# Altium PCB PCB_TRAFFICLIGHT.PcbDoc
Units mil, origin at the board's own origin, x right, y up, seen from the top; angles counter-clockwise.
Board outline 3825 x 2140 mil, 2 copper layers (Top Layer, Bottom Layer); 8 components, 8 nets, 44 pads, 0 vias.
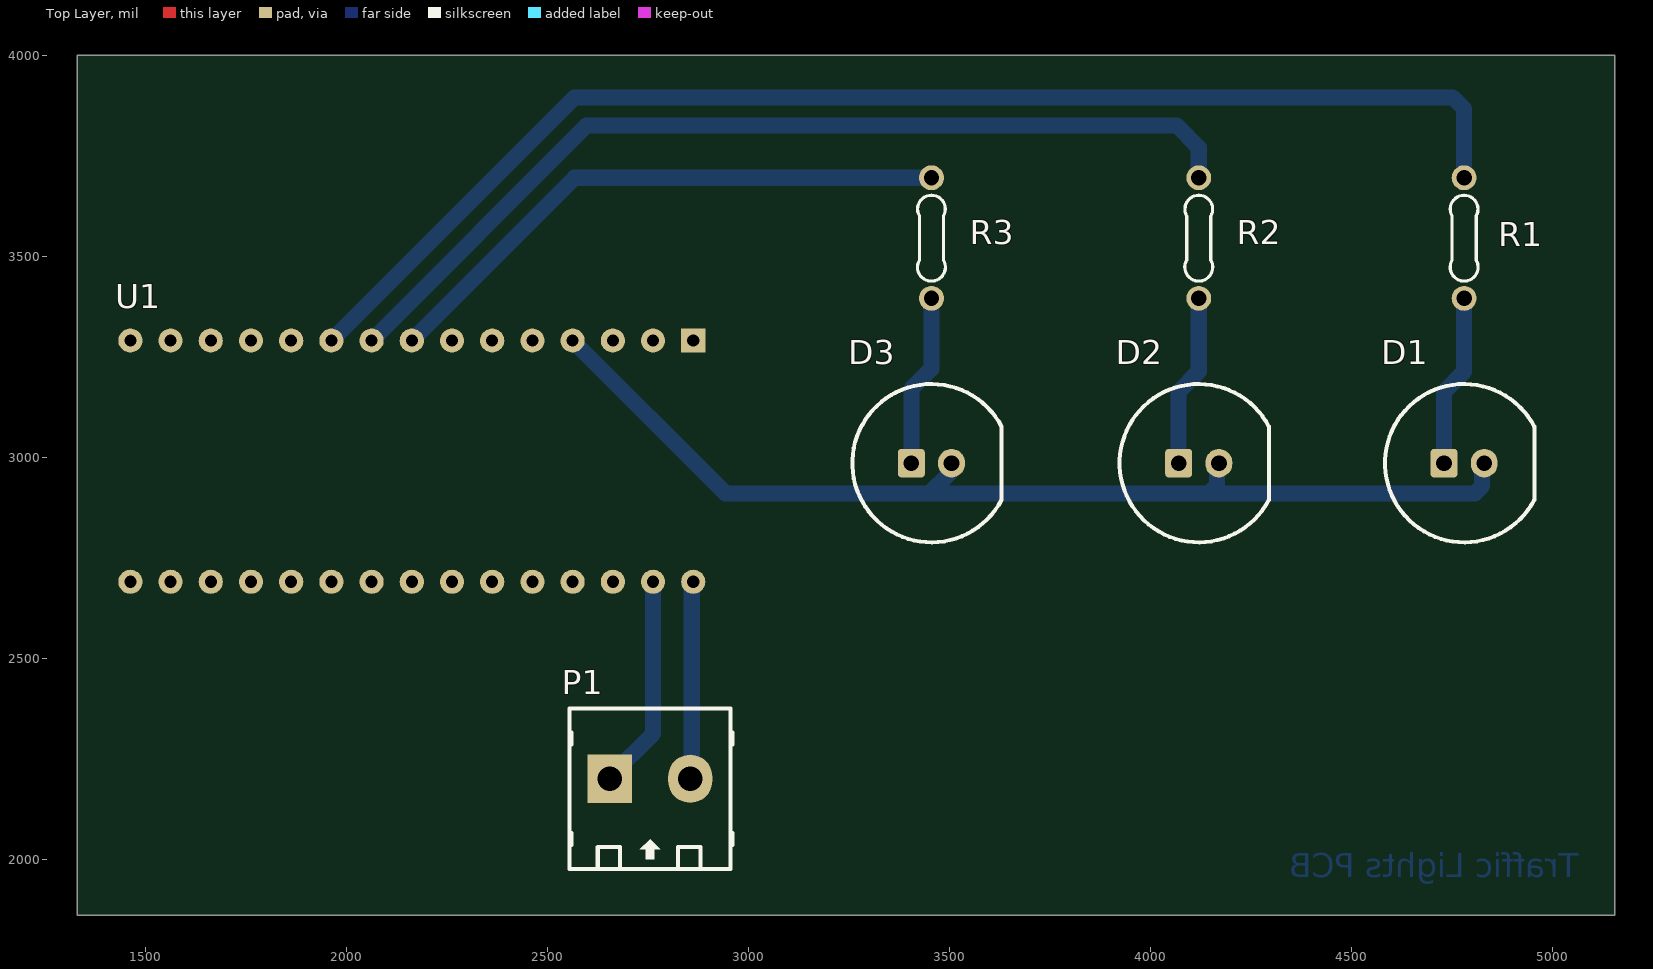
[diagram p0: Top Layer view]
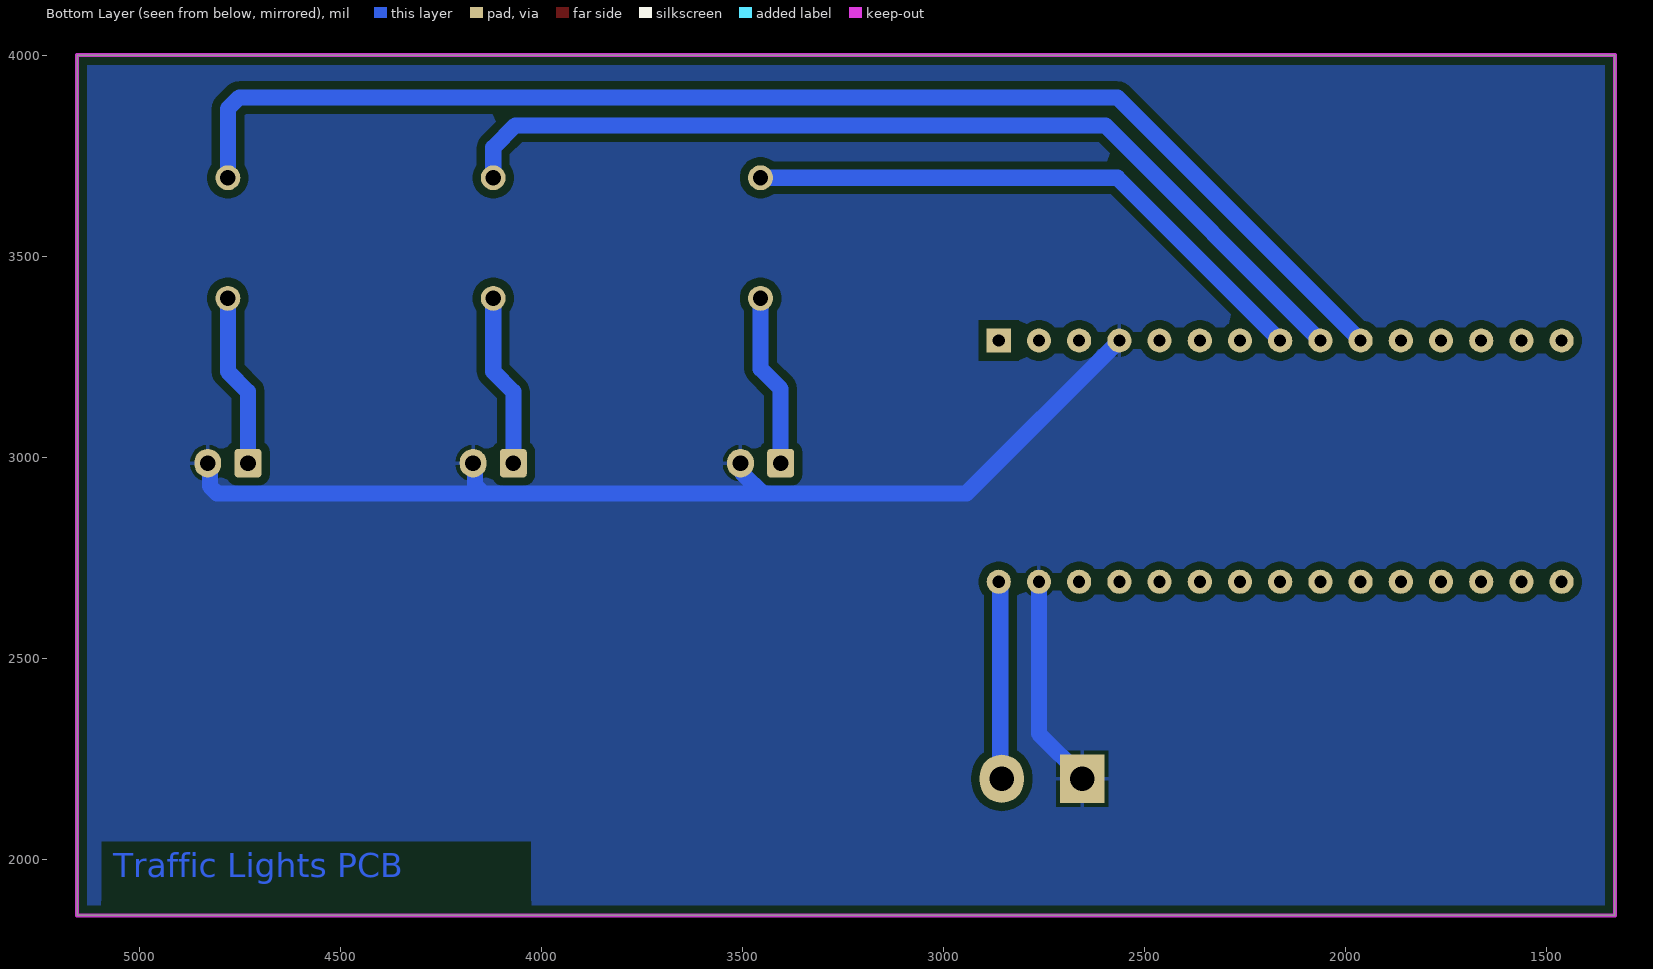
[diagram p1: Bottom Layer view, seen from below]

## Layer stack, top to bottom
Top Solder: solder mask 0.4, Solder Resist, Dk 3.5
Top Layer: signal copper 1.4
Dielectric 1: dielectric 12.6, FR-4, Dk 4.8
Bottom Layer: signal copper 1.4
Bottom Solder: solder mask 0.4, Solder Resist, Dk 3.5

## Board outline
1330,1860 5155,1860 5155,4000 1330,4000

## Design rules (kind name [scope] priority, off if disabled: settings)
Clearance [All] p1: gap=20 ignorepadtopadclearanceinfootprint=FALSE
PolygonConnect [All] p1: connectstyle=Relief reliefconductorwidth=10 reliefentries=4 polygonreliefangle="90 Angle" airgapwidth=10
RoutingVias [All] p1: holewidth=23.62 width=39.37 viastyle="Through Hole" minholewidth=23.62 minwidth=39.37 maxholewidth=23.62 maxwidth=39.37
SolderMaskExpansion [All] p1: expansion=4 istentingtop=FALSE
SupplyNets "Schematic Supply Nets_1" [InNet('+5')] p1: voltage=0.000
SupplyNets "Schematic Supply Nets" [InNet('GND')] p2: voltage=0.000
Width [All] p1: maxlimit=100 minlimit=20 preferedwidth=40
30 further rules are at their usual default settings.

## Components (designator, comment, footprint, x,y, rotation, side; value= is the part's Value field where it differs from the comment)
D1 "LED RED" "LED 10MM - RED" 4780,2985 r0 top
D2 "LED YELLOW" "LED 10MM - YELLOW" 4120,2985 r0 top
D3 "LED GREEN" "LED 10MM - GREEN" 3455,2985 r0 top
P1 "Header 1" HDR/Terminal/2 2755,2200 r0 top
R1 "200" "R 1/4W/300" 4780,3695 r270 top
R2 "200" "R 1/4W/300" 4120,3695 r270 top
R3 "200" "R 1/4W/300" 3455,3695 r270 top
U1 "Arduino Nano" "Arduino nano" 3022.5,3350 r180 top locked

## Footprints (in the part's own frame and the unit in brackets; to place one, negate y for a bottom-side part, rotate by r counter-clockwise, add the part's x,y. Pads: shape width x height; smd on the part's side, far side on the other; paste and mask are expansions set on the pad)
"Arduino nano" [mil] "arduino nano"
  rect 60x60 hole 30: 0(160,60)
  round 60 hole 30: 1(260,60) 2(360,60) 3(460,60) 4(560,60) 5(660,60) 6(760,60) 7(860,60) 8(960,60) 9(1060,60) 10(1160,60) 11(1260,60) 12(1360,60) 13(1460,60) 14(1560,60) 15(1560,660) 16(1460,660) 17(1360,660) 18(1260,660) 19(1160,660) 20(1060,660) 21(960,660) 22(860,660) 23(760,660) 24(660,660) 25(560,660) 26(460,660) 27(360,660) 28(260,660) 29(160,660)
HDR/Terminal/2 [mil] "Header 2, 2 pin, hight 400mil, Pin to Pin 200mil, Colour Green"
  rect 110x120 hole 60: 1(-100,0)
  oval 110x120 hole 60: 2(100,0)
  silkscreen extent -200,-225 205,175, body extent -229,-218 200,168, height 559
"LED 10MM - GREEN" [mm]
  rrect25% 1.7x1.8 hole 1: 1(-1.27,0)
  oval 1.7x1.8 hole 1: 2(1.27,0)
  silkscreen extent -5,-5 4.44,5, body extent -5.5,-5.5 5.5,5.5, height 14.15
"LED 10MM - RED" [mm]
  rrect25% 1.7x1.8 hole 1: 1(-1.27,0)
  oval 1.7x1.8 hole 1: 2(1.27,0)
  silkscreen extent -5,-5 4.44,5, body extent -5.5,-5.5 5.5,5.5, height 14.15
"LED 10MM - YELLOW" [mm]
  rrect25% 1.7x1.8 hole 1: 1(-1.27,0)
  oval 1.7x1.8 hole 1: 2(1.27,0)
  silkscreen extent -5,-5 4.44,5, body extent -5.5,-5.5 5.5,5.5, height 14.15
"R 1/4W/300" [mil] "Through hole resitor, axial 300mils, 1/4W"
  round 62 hole 38: 1(0,0) 2(300,0)
  silkscreen extent 44,-35 257,35, body extent -12,-47 312,47, height 97

## Part data
D1 D2 D3: "Typical LED 3-pin 2-color"
P1: library part "Header 2", "Header, 2-Pin"
R1 R2 R3: library part Resistor, "Resistor"
U1: library part arduinoNano

## Nets (pads, with @x,y where several pads share a name; then routed paths per layer and width w, separated by ;. In a path a pad name is that pad's centre, name@x,y a point inside that pad or via, vN(x,y) a via of type N, cw(c..) or ccw(c..) an arc to the next point about the centre after c; other vN are vias at no path point)
+5: P1.2 U1.29 | length 517
  Bottom Layer w40: P1.2@2855,2223.94 P1.2 2858.75,2203.75 2858.75,2686.25 U1.29
GND: D1.2 D2.2 D3.2 P1.1 U1.3 U1.28 | length 3251.4
  Bottom Layer w40: U1.3 2942.93,2909.57 3450.13,2909.57 ; P1.1@2683.67,2228.67 P1.1 2655,2205 2762.5,2312.5 U1.28 U1.28@2758.67,2686.17 ; D3.2 3499.85,2979.85 3499.85,2959.28 3450.13,2909.57 ; D2.2 4164.85,2979.85 4164.85,2929.85 4144.57,2909.57 ; D1.2 4824.85,2979.85 4824.85,2927.85 4806.57,2909.57 4144.57,2909.57 ; 3450.13,2909.57 4144.57,2909.57
NetD1_1: D1.1 R1.2 | length 430.7
  Bottom Layer w40: D1.1 4730,3163.01 4780,3213.01 R1.2
NetD2_1: D2.1 R2.2 | length 430.7
  Bottom Layer w40: D2.1 4070,3163.01 4120,3213.01 R2.2
NetD3_1: D3.1 R3.2 | length 430.7
  Bottom Layer w40: D3.1 3405,3169.74 3455,3219.74 R3.2
NetR1_1: R1.1 U1.9 | length 3251.4
  Bottom Layer w40: U1.9 2567.5,3895 4751.57,3895 4780,3866.57 R1.1
NetR2_1: R2.1 U1.8 | length 2376.9
  Bottom Layer w40: U1.8 2597.5,3825 4065,3825 4120,3770 R2.1
NetR3_1: R3.1 U1.7 | length 1460.3
  Bottom Layer w40: U1.7 2567.5,3695 R3.1
pads on no net: U1.0 U1.1 U1.2 U1.4 U1.5 U1.6 U1.10 U1.11 U1.12 U1.13 U1.14 U1.15 U1.16 U1.17 U1.18 U1.19 U1.20 U1.21 U1.22 U1.23 U1.24 U1.25 U1.26 U1.27

## Polygon pours and split planes (outlines as drawn)
GND on Bottom Layer "GND_L02_P002" (solid, remove dead copper, pour order 2): 1330,4000 5155,4000 5155,1860 1330,1860
no net on Bottom Layer "NONET_L02_P001" (solid, remove dead copper, pour order 1): 1330,4000 5155,4000 5155,1860 1330,1860
no net on Bottom Layer "NONET_L02_P000" (solid, remove dead copper, pour order 0): 1330,4000 5155,4000 5155,1860 1330,1860

## Keep-outs
Bottom Layer:
  the board outline again, w10

## Other copper
Bottom Layer:
  text "Traffic Lights PCB" at 5065,1954.99 h60

## Silkscreen, mask and mechanical layers (free items; w line width, h text height)
Board:
  lines w5: 9091.41,758.51 9091.41,3693.9